# EAGLE board uBridge2.0 (EAGLE 6.2)
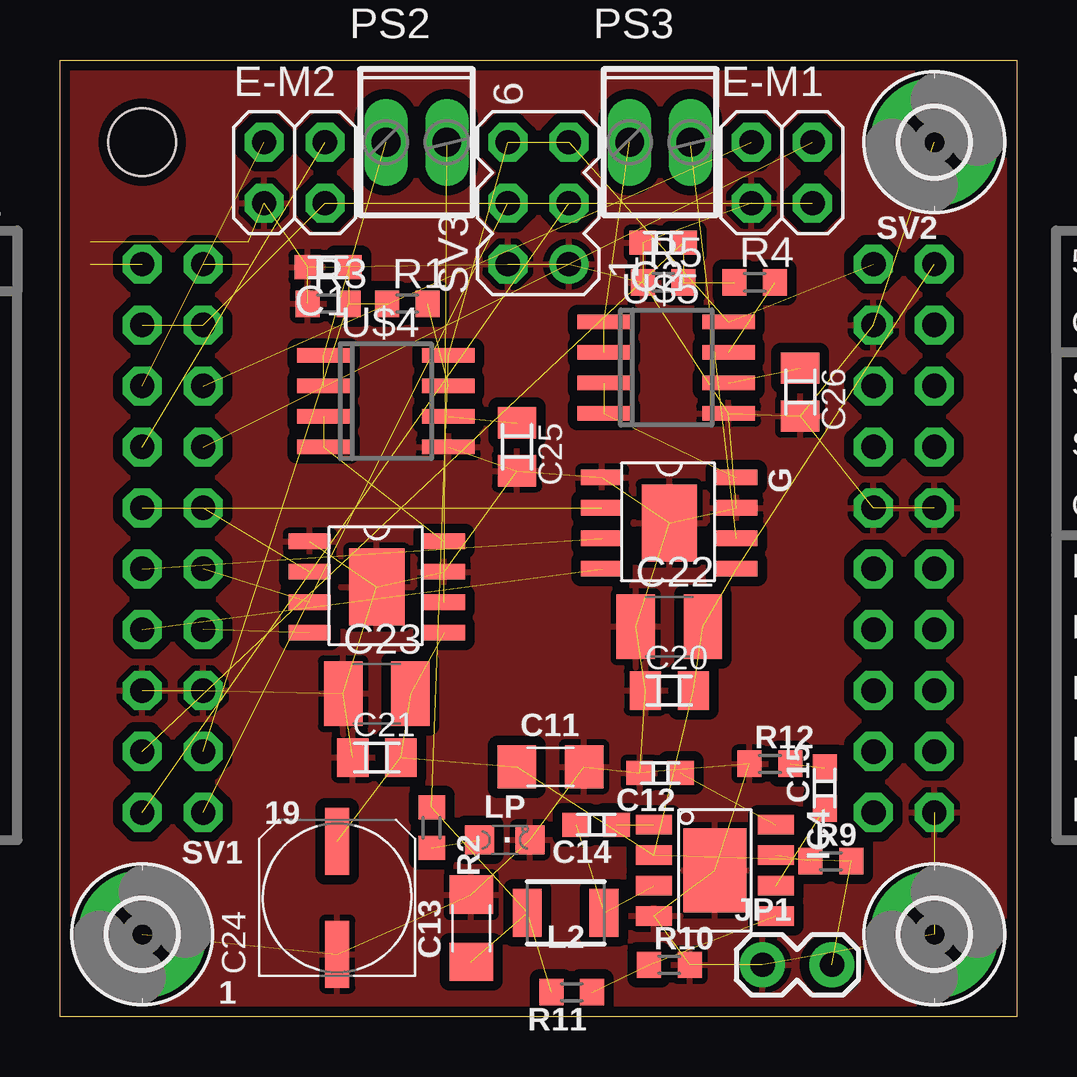
[diagram p0: board, top side]
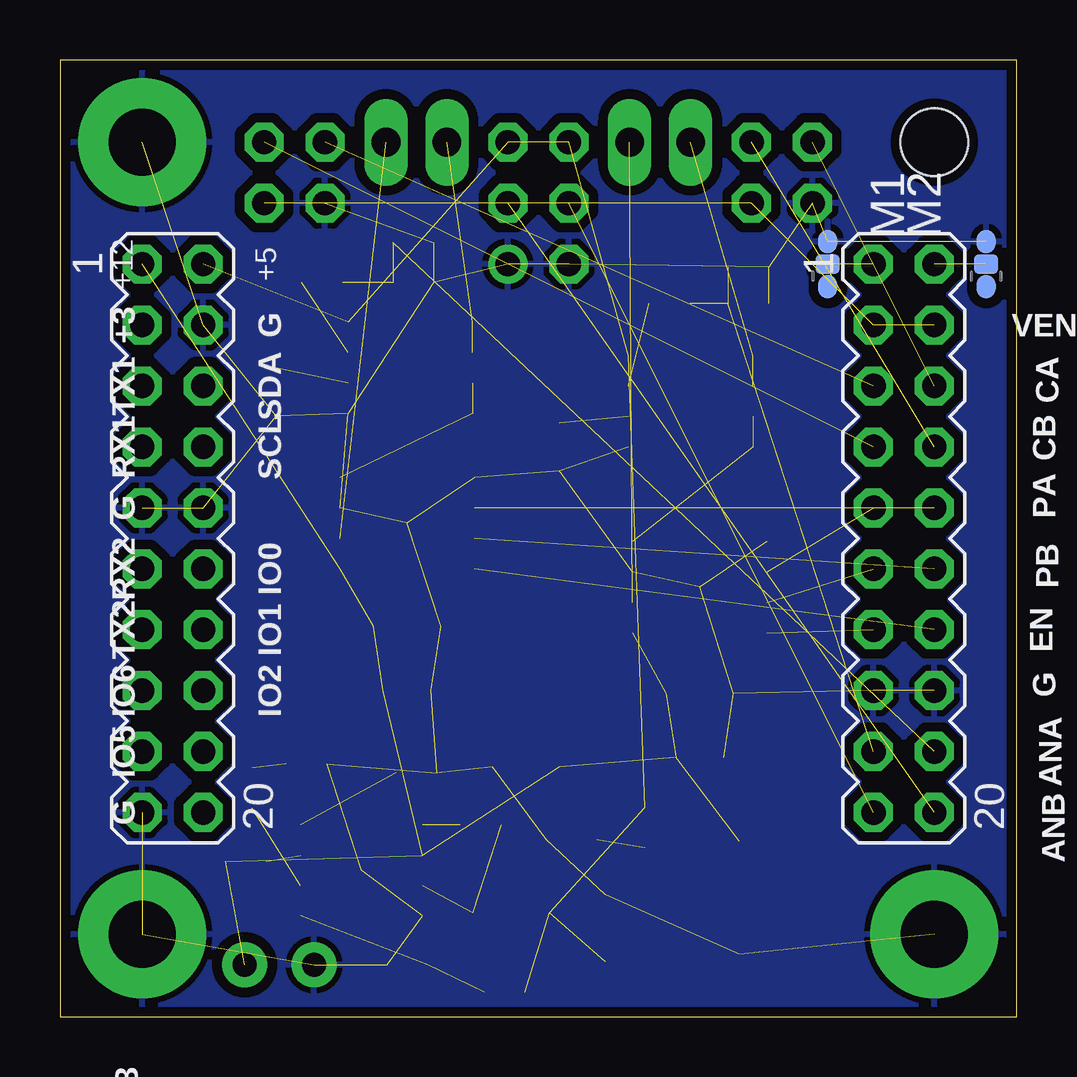
[diagram p1: board, bottom side, seen from below]

Size 39.88 x 39.88 mm. Coordinates in mm from the lower left corner, seen from the top.
Outline: 39.88,0 0,0 0,39.88 39.88,39.88 39.88,0
Copper layers (1*16): Top 0.035mm / dielectric 1.5mm / Bottom 0.035mm
Design rules: minimum track width 8mil, minimum drill 12mil, track to track 8mil, track to pad 8mil, pad to pad 8mil, via to via 8mil, smd to smd 8mil, copper to edge 10mil, drill to drill 8mil, minimum pad ring 12mil, minimum via ring 8mil, stop-mask expansion 4mil, vias tented up to drill 20mil, thermal gap 10mil
Net classes: 0 default: width 0.254 mm, drill 0.406 mm, clearance 0.178 mm; 1 power: width 0.305 mm, drill 0.406 mm, clearance 0.203 mm
Holes 2.8 mm at 3.43,36.45

## Footprints (pad centres in the part's own frame; a part is rotated, then mirrored left to right if it is on the bottom)
C0603 = smd 1.1 x 1: 1 -0.85,0; 2 0.85,0
C1206 = smd 1.6 x 1.8: 1 -1.4,0; 2 1.4,0
C0805K = smd 1.3 x 1.6: 1 -1,0; 2 1,0
C3225 = smd 1.6 x 2.7: 1 -1.4,0; 2 1.4,0
UD-6,3X7,7_NICHICON = smd 2.8 x 1: + 2.35,0; - -2.35,0
2X02 = drill 1.016 octagon: 1 -1.27,-1.27; 2 -1.27,1.27; 3 1.27,-1.27; 4 1.27,1.27
2,8-PAD = drill 2.8 pad 5.334: B2,8 0,0
SO-8EP = smd 0.802 x 1.505: 1 -1.905,-2.54; 2 -0.635,-2.54; 3 0.635,-2.54; 4 1.905,-2.54; 5 1.905,2.54; 6 0.635,2.54; 7 -0.635,2.54; 8 -1.905,2.54 | smd 3.501 x 2.613: PAD 0,0
C0R-JMP = smd 0.8 x 1: 1 0,0.938; 3 0,-0.938 | smd 1 x 0.8: 2 0,0
1X02_LOCK = drill 1.016 pad 1.88: 1 -0.178,0; 2 2.718,0
1210 = smd 1.2 x 2: 1 -1.6,0; 2 1.6,0
CHIPLED_0805 = smd 1.2 x 1.2: A 0,-1.05; C 0,1.05
2POL254 = drill 1.2 long: 1 -1.27,0; 2 1.27,0
R0603 = smd 1 x 1.1: 1 -0.85,0; 2 0.85,0
MA10-2 = drill 1.016 octagon: 1 -11.43,-1.27; 2 -11.43,1.27; 3 -8.89,-1.27; 4 -8.89,1.27; 5 -6.35,-1.27; 6 -6.35,1.27; 7 -3.81,-1.27; 8 -3.81,1.27; 9 -1.27,-1.27; 10 -1.27,1.27; 11 1.27,-1.27; 12 1.27,1.27; 13 3.81,-1.27; 14 3.81,1.27; 15 6.35,-1.27; 16 6.35,1.27; 17 8.89,-1.27; 18 8.89,1.27; 19 11.43,-1.27; 20 11.43,1.27
MA03-2 = drill 1.016: 1 -2.54,-1.27 | drill 1.016 octagon: 2 -2.54,1.27; 3 0,-1.27; 4 0,1.27; 5 2.54,-1.27; 6 2.54,1.27
SOICN = smd 0.65 x 1.75: 1VIN -1.905,-2.8; 2TON -0.635,-2.8; 3EN 0.635,-2.8; 4CS 1.905,-2.8; 5VCC 1.905,2.8; 6GND 0.635,2.8; 7BOOT -0.635,2.8; 8SW -1.905,2.8 | smd 3.2 x 2.3: PAD 0,0
SO08 = smd 0.6 x 2.2: 1 -1.905,-2.6; 2 -0.635,-2.6; 3 0.635,-2.6; 4 1.905,-2.6; 5 1.905,2.6; 6 0.635,2.6; 7 -0.635,2.6; 8 -1.905,2.6

## Placement (x,y rotation side)
C1  100nF/S2  [C0603]  11.18,31.24 180 top
C2  100nF/S2  [C0603]  25.15,32.26 180 top
C11  22uF 35V 20% JB 1206  [C1206]  20.45,10.41 0 top
C12  100nF/S2  [C0603]  25.02,10.16 180 top
C13  22uf  [C1206]  17.14,3.68 90 top
C14  10nF/S  [C0603]  22.35,8 180 top
C15  10nF/S2  [C0603]  31.88,9.53 90 top
C20  220nF  [C0805K]  25.4,13.59 0 top
C21  220nF  [C0805K]  13.21,10.79 0 top
C22  10uF/S6 50V  [C3225]  25.4,16.26 0 top
C23  10uF/S6 50V  [C3225]  13.21,13.46 0 top
C24  PCE4554CT-ND  [UD-6,3X7,7_NICHICON]  11.56,4.95 90 top
C25  1nF  [C0805K]  19.05,23.75 270 top
C26  1nF  [C0805K]  30.86,26.04 270 top
E-M1  [2X02]  30.1,35.18 0 top
E-M2  [2X02]  9.78,35.18 0 top
H1  MOUNT-PAD-ROUND2.8  [2,8-PAD]  3.43,3.43 0 top
H2  MOUNT-PAD-ROUND2.8  [2,8-PAD]  36.45,3.43 0 top
H3  MOUNT-PAD-ROUND2.8  [2,8-PAD]  36.45,36.45 0 top
IC4  AP6503SP-13  [SO-8EP]  27.3,6.1 270 top
JMP5  0R-JUMPC  [C0R-JMP]  1.27,31.37 180 bottom
JMP6  0R-JUMPC  [C0R-JMP]  7.87,31.37 180 bottom
JP1  M02LOCK  [1X02_LOCK]  29.46,2.16 0 top
L2  10uH_520mA  [1210]  21.08,4.32 180 top
LP  Green  [CHIPLED_0805]  18.54,7.37 270 top
PS2  [2POL254]  14.86,36.45 0 top
PS3  [2POL254]  25.02,36.45 0 top
R1  6K49/S 1%  [R0603]  14.48,29.72 0 top
R2  1K/S 1%  [R0603]  15.49,7.87 90 top
R3  3K3/S 1%  [R0603]  11.18,29.72 0 top
R4  6K49/S 1%  [R0603]  28.96,30.61 0 top
R5  3K3/S 1%  [R0603]  25.15,30.61 0 top
R9  100K0/S2 1%  [R0603]  32.13,6.48 0 top
R10  10K0/S 1%  [R0603]  25.4,2.16 0 top
R11  45K3/S 1%  [R0603]  21.34,1.02 180 top
R12  10K0/S 1%  [R0603]  29.59,10.54 0 top
SV1  [MA10-2]  4.7,19.94 270 bottom
SV2  [MA10-2]  35.18,19.94 270 bottom
SV3  [MA03-2]  19.94,33.91 90 top
U$2  A4950  [SOICN]  13.21,17.91 270 top
U$3  A4950  [SOICN]  25.4,20.57 270 top
U$4  ACS723  [SO08]  13.59,25.65 270 top
U$5  ACS723  [SO08]  25.27,27.05 270 top

## Library data of the parts
C1 C2 C11-C15 C20 C21 C24-C26 R1-R5 R9-R12 = rcl
C22 C23 = rcl; CASE: C3225 [EIA CC1210]; CODE: CL32B106KBJNNNE; KATODO: 10.1050.0010; TEMPERATURE: X7S
E-M1 E-M2 = pinhead
H1-H3 = holes
IC4 = OfficineRobotiche
JMP5 JMP6 = jump-0r-smd
JP1 = SparkFun-Connectors
L2 = SparkFun-Passives
LP = led
PS2 PS3 = Personale
SV1-SV3 = con-lstb; OC_FARNELL: unknown; OC_NEWARK: unknown
U$2-U$5 = allegro

## Nets
+3V3: SV2.3
+5V: C13.1 L2.2 R2.2 R11.2 SV2.2 SV3.5 SV3.6 U$4.8 U$5.8
+12V: C11.1 C20.2 C21.2 C22.2 C23.2 C24.+ IC4.2 JP1.2 R9.2 SV2.1 U$2.5VCC U$3.5VCC
ANA1: C1.1 R1.1 R3.2 SV1.17
ANA2: C2.1 R4.1 R5.2 SV1.18
ANB1: SV1.19 SV3.4
ANB2: SV1.20 SV3.3
CHA1: E-M1.2 SV1.5
CHA2: E-M2.2 SV1.6
CHB1: E-M1.4 SV1.7
CHB2: E-M2.4 SV1.8
EN1: SV1.13 U$2.4CS
EN2: SV1.14 U$3.4CS
GND: C1.2 C2.2 C11.2 C12.2 C13.2 C20.1 C21.1 C22.1 C23.1 C24.- C25.2 C26.2 E-M1.1 E-M2.1 H1.B2,8 H2.B2,8 H3.B2,8 IC4.4 IC4.PAD JMP5.3 JMP6.3 JP1.1 LP.C R3.1 R5.1 R10.2 R12.1 SV1.15 SV1.16 SV2.4 SV2.9 SV2.10 SV2.19 SV3.1 SV3.2 U$2.1VIN U$2.7BOOT U$2.PAD U$3.1VIN U$3.7BOOT U$3.PAD U$4.5 U$5.5
IO0: SV2.12
IO1: SV2.14
IO2: SV2.16
IO3: SV2.18
IO4: SV2.20
IO5: SV2.17
IO6: SV2.15
IO7: JMP5.1
IO8: JMP6.1
N$1: R1.2 U$4.7
N$2: R4.2 U$5.7
N$4: C14.1 IC4.1
N$5: LP.A R2.1
N$6: IC4.7 R9.1
N$8: C12.1 IC4.8
N$9: IC4.5 R10.1 R11.1
N$10: JMP5.2 SV1.2
N$14: U$2.8SW U$4.3 U$4.4
N$15: C14.2 IC4.3 L2.1
N$16: C15.1 IC4.6
N$17: C15.2 R12.2
N$19: U$3.8SW U$5.3 U$5.4
N$20: PS2.1 U$4.1 U$4.2
N$23: JMP6.2 SV1.1
N$24: PS3.1 U$5.1 U$5.2
N$25: PS2.2 U$2.6GND
N$26: PS3.2 U$3.6GND
N$27: C25.1 U$4.6
N$28: C26.1 U$5.6
PWMA1: SV1.9 U$2.2TON
PWMA2: SV1.10 U$3.2TON
PWMB1: SV1.11 U$2.3EN
PWMB2: SV1.12 U$3.3EN
RX1: SV2.7
RX2: SV2.11
SCL: SV2.8
SDA: SV2.6
TX1: SV2.5
TX2: SV2.13
VENC: E-M1.3 E-M2.3 SV1.3 SV1.4

## Tracks (layer width: path | path; a pad name or v marks a point on that pad's centre or on a via)
+5V  (8 unrouted)
+12V  (11 unrouted)
ANA1  (3 unrouted)
ANA2  (3 unrouted)
ANB1  (1 unrouted)
ANB2  (1 unrouted)
CHA1  (1 unrouted)
CHA2  (1 unrouted)
CHB1  (1 unrouted)
CHB2  (1 unrouted)
EN1  (1 unrouted)
EN2  (1 unrouted)
GND  (42 unrouted)
  pour Top (isolate 0.406): 0,39.88 0,0 39.88,0 39.88,39.88
  pour Bottom (isolate 0.406): 0,39.88 0,0 39.88,0 39.88,39.88
N$1  (1 unrouted)
N$2  (1 unrouted)
N$4  (1 unrouted)
N$5  (1 unrouted)
N$6  (1 unrouted)
N$8  (1 unrouted)
N$9  (2 unrouted)
N$10  (1 unrouted)
N$14  (2 unrouted)
N$15  (2 unrouted)
N$16  (1 unrouted)
N$17  (1 unrouted)
N$19  (2 unrouted)
N$20  (2 unrouted)
N$23  (1 unrouted)
N$24  (2 unrouted)
N$25  (1 unrouted)
N$26  (1 unrouted)
N$27  (1 unrouted)
N$28  (1 unrouted)
PWMA1  (1 unrouted)
PWMA2  (1 unrouted)
PWMB1  (1 unrouted)
PWMB2  (1 unrouted)
VENC  (3 unrouted)

## Text on the board
tPlace: M2 | M1 | BUS | IO7 | IO8 | 5V | 12V | VENC | GND | 3v | CHA | SDA | TX1 | CHB | SCL | RX1 | G | PWMA | GND | GND | PWMB | IO0 | RX2 | EN | IO1 | TX2 | GND | IO2 | IO6 | AN A | IO3 | IO5 | www.officinerobotiche.it | uNav44 Rel1 | AN B | 19 | IO4 | GND | 1
bPlace: CZ | M2 | M1 | IO7 | IO8 | +5 | +12 | VENC | G | +3 | CA | SDA | TX1 | CB | SCL | RX1 | PA | G | MCL | PB | IO0 | RX2 | 3V | EN | IO1 | TX2 | G | G | IO2 | IO6 | PGD | ANA | IO5 | PGC | G | ANB | +5V | GND | IO3 | IO4